# Altium PCB CW308T_EMF32GG11.PcbDoc
Units mil, origin at the board's own origin, x right, y up, seen from the top; angles counter-clockwise.
Board outline 2055 x 2540 mil, 2 copper layers (Top Layer, Bottom Layer); 14 components, 25 nets, 161 pads, 68 vias.
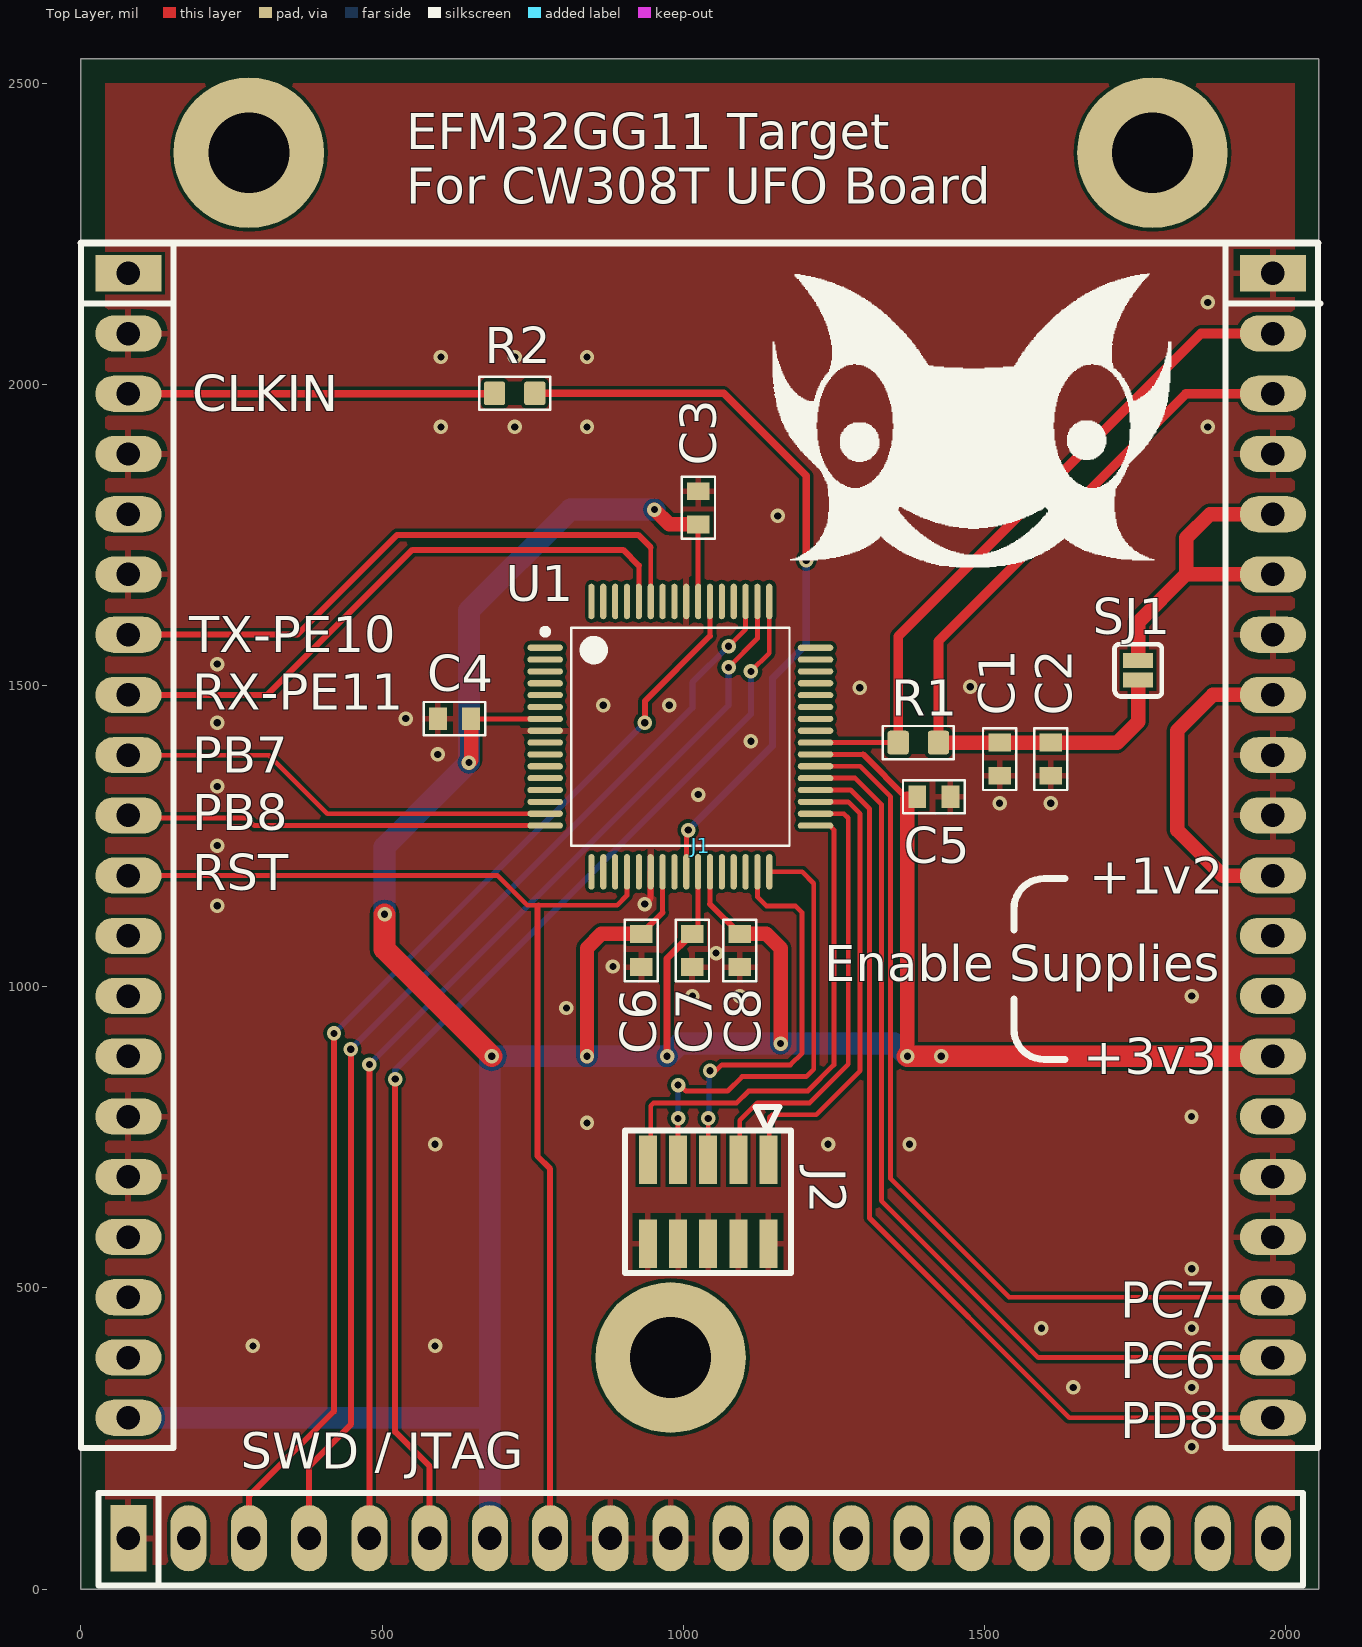
[diagram p0: Top Layer view]
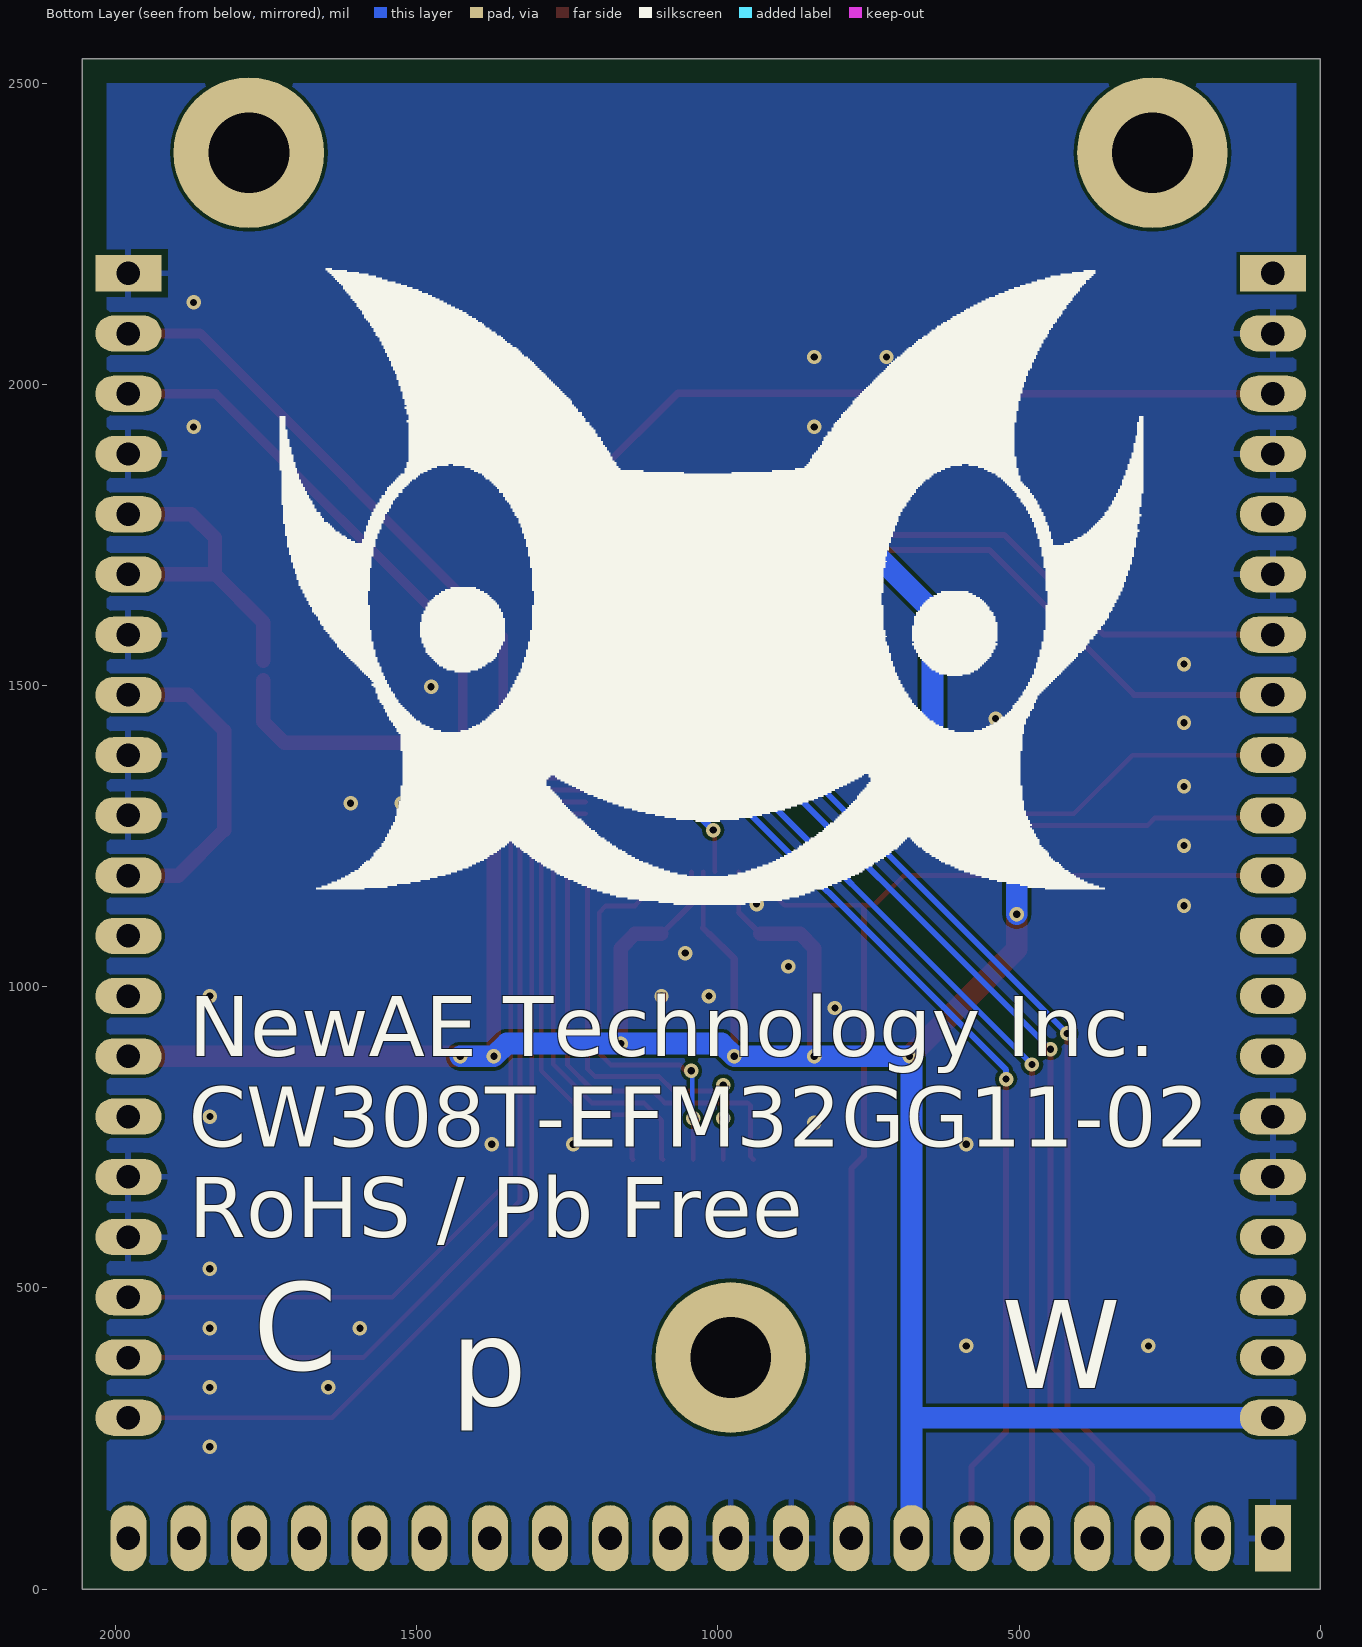
[diagram p1: Bottom Layer view, seen from below]

## Layer stack, top to bottom
Top Solder: solder mask 0.4, Solder Resist, Dk 3.5
Top Layer: signal copper 1.4
Dielectric 1: dielectric 12.6, FR-4, Dk 4.8
Bottom Layer: signal copper 1.4
Bottom Solder: solder mask 0.4, Solder Resist, Dk 3.5

## Board outline
0,0 2055,0 2055,2540 0,2540

## Design rules (kind name [scope] priority, off if disabled: settings)
BoardOutlineClearance Silk_to_Outline [(OnLayer('Top Overlay'))] p1: gap=0 ignorepadtopadclearanceinfootprint=FALSE
BoardOutlineClearance [All] p2: gap=40 ignorepadtopadclearanceinfootprint=FALSE
Clearance [All] p1: gap=6 ignorepadtopadclearanceinfootprint=FALSE except(0: Arc-Hole Track-Hole SMDPad-Hole THPad-Hole Via-Hole Fill-Hole Poly-Hole Region-Hole Text-Hole)
HoleSize [All] p1: absolutevalues=TRUE maxlimit=200 minlimit=1 maxpercent=80.000 minpercent=20.000
MinimumSolderMaskSliver [All] p1: minsoldermaskwidth=5
PlaneConnect PlaneConnect_viaDirect [IsVia] p1: planeconnectstyle=Direct reliefexpansion=20 reliefentries=4 reliefconductorwidth=10 reliefairgap=10
PlaneConnect [All] p2: planeconnectstyle=Relief reliefexpansion=20 reliefentries=4 reliefconductorwidth=10 reliefairgap=10
PolygonConnect PolygonConnect_viaDirect [All vs isVia] p1: connectstyle=Direct reliefconductorwidth=10 reliefentries=4 polygonreliefangle="90 Angle" airgapwidth=10
PolygonConnect [All] p2: connectstyle=Relief reliefconductorwidth=10 reliefentries=4 polygonreliefangle="90 Angle" airgapwidth=10
RoutingVias [All] p1: holewidth=28 width=50 viastyle="Through Hole" minholewidth=28 minwidth=50 maxholewidth=28 maxwidth=50 useviatemplates=TRUE viatemplateguid#1={1A3752DF-5185-4C8F-B12F-78C2E36E3B79} viatemplateguid#2={10C6E2E2-26C8-43AE-A37D-40FB085232FA} viatemplateguid#3={3CB7D92B-ADEE-4C2B-B6B5-F2CE337C13DB} viatemplatename#1=v61h30m0mx0 viatemplatename#2=v86h41m0mx0 viatemplatename#3=v127h71m0mx0
SilkToSilkClearance [All] p1: silktosilkclearance=5
SilkToSolderMaskClearance [IsPad] p1: minsilkscreentomaskgap=5 clearancetoexposedcopper=TRUE
SolderMaskExpansion [All] p1: expansion=4 istentingtop=FALSE
Width [All] p1: maxlimit=100 minlimit=6 preferedwidth=8 minimp=50.000000 maximp=50.000000 favimp=50.000000
25 further rules are at their usual default settings.

## Components (designator, comment, footprint, x,y, rotation, side; value= is the part's Value field where it differs from the comment)
C1 "100n" CAPC0603_M 1525,1377.6 r270 top
C2 "2u2" CAPC0603_M 1610,1377.6 r270 top
C3 "100n" CAPC0603_M 1025,1795 r90 top
C4 "100n" CAPC0603_M 620,1445 r180 top
C5 "100n" CAPC0603_M 1415.83,1315.21 r0 top
C6 "100n" CAPC0603_M 930,1060 r270 top
C7 "100n" CAPC0603_M 1015,1060 r270 top
C8 "100n" CAPC0603_M 1093.74,1060 r270 top
J1 "CW308_TARGETCON" CW308_TBOARD_CONN 78.74,2184.25 r0 top locked
J2 "1296-T10" 1296-T10 1041.19,643.03 r180 top
R1 "22R" RESC1608X55N 1390,1405.16 r0 top
R2 "22R" RESC1608X55N 720,1985 r180 top
SJ1 "NO" SJ_2S_NO 1755,1525 r90 top
U1 "EFM32GG11B1" TQFP50P1200X1200X120-64N 995,1415 r0 top locked

## Footprints (in the part's own frame and the unit in brackets; to place one, negate y for a bottom-side part, rotate by r counter-clockwise, add the part's x,y. Pads: shape width x height; smd on the part's side, far side on the other; paste and mask are expansions set on the pad)
1296-T10 [mm] "1.27mm x 10-pin"
  rect 0.76x2.05 smd: 1(-2.54,-1.775) 2(-2.54,1.775) 3(-1.27,-1.775) 4(-1.27,1.775) 5(0,-1.775) 6(0,1.775) 7(1.27,-1.775) 8(1.27,1.775) 9(2.54,-1.775) 10(2.54,1.775)
  silkscreen extent -3.5,-4 3.5,3
CAPC0603_M [mm]
  rect 0.75x0.95 smd: 1(-0.7,0) 2(0.7,0)
  silkscreen extent -1.3,-0.7 1.3,0.7, body extent -0.85,-0.45 0.85,0.45, height 0.9
CW308_TBOARD_CONN [mil]
  rect 110x60 hole 39: A1(0,0) C1(1900,0)
  oval 110x60 hole 39: A2(0,-100) A3(0,-200) A4(0,-300) A5(0,-400) A6(0,-500) A7(0,-600) A8(0,-700) A9(0,-800) A10(0,-900) A11(0,-1000) A12(0,-1100) A13(0,-1200) A14(0,-1300) A15(0,-1400) A16(0,-1500) A17(0,-1600) A18(0,-1700) A19(0,-1800) A20(0,-1900) C2(1900,-100) C3(1900,-200) C4(1900,-300) C5(1900,-400) C6(1900,-500) C7(1900,-600) C8(1900,-700) C9(1900,-800) C10(1900,-900) C11(1900,-1000) C12(1900,-1100) C13(1900,-1200) C14(1900,-1300) C15(1900,-1400) C16(1900,-1500) C17(1900,-1600) C18(1900,-1700) C19(1900,-1800) C20(1900,-1900)
  rect 60x110 hole 39: B1(0,-2100)
  oval 60x110 hole 39: B2(100,-2100) B3(200,-2100) B4(300,-2100) B5(400,-2100) B6(500,-2100) B7(600,-2100) B8(700,-2100) B9(800,-2100) B10(900,-2100) B11(1000,-2100) B12(1100,-2100) B13(1200,-2100) B14(1300,-2100) B15(1400,-2100) B16(1500,-2100) B17(1600,-2100) B18(1700,-2100) B19(1800,-2100) B20(1900,-2100)
  round 250 hole 134: MH1(200,200) MH2(900,-1800) MH2(1700,200)
  silkscreen extent -79,-2179 1979,50, body extent -50,-2149 1950,50, height 48
RESC1608X55N [mm] "Chip Resistor, Body 1.6x0.8mm, EIA 0603, IPC Medium Density"
  round 0.254 on Mech15: 0(0,0)
  rrect25% 0.9x1 smd: 1(-0.85,0) 2(0.85,0)
  Top Layer pour cut-out: -0.6,0.5 0.6,0.5 0.6,-0.5 -0.6,-0.5
  silkscreen extent -1.5,-0.7 1.5,0.7, body extent -0.87,-0.47 0.88,0.48, height 0.54
SJ_2S_NO [mil] "Solder Jumper, open (no paste)"
  rect 25x50 smd paste-393.7: 1(-16.22,0) 2(16.22,0)
  silkscreen extent -43,-39 43,39
TQFP50P1200X1200X120-64N [mm] "TQFP, 64-Leads, Body 10.00x10.00mm, Pitch 0.50mm, IPC Medium Density"
  oval 1.5x0.26 smd: 1(-5.7,3.75) 2(-5.7,3.25) 3(-5.7,2.75) 4(-5.7,2.25) 5(-5.7,1.75) 6(-5.7,1.25) 7(-5.7,0.75) 8(-5.7,0.25) 9(-5.7,-0.25) 10(-5.7,-0.75) 11(-5.7,-1.25) 12(-5.7,-1.75) 13(-5.7,-2.25) 14(-5.7,-2.75) 15(-5.7,-3.25) 16(-5.7,-3.75) 33(5.7,-3.75) 34(5.7,-3.25) 35(5.7,-2.75) 36(5.7,-2.25) 37(5.7,-1.75) 38(5.7,-1.25) 39(5.7,-0.75) 40(5.7,-0.25) 41(5.7,0.25) 42(5.7,0.75) 43(5.7,1.25) 44(5.7,1.75) 45(5.7,2.25) 46(5.7,2.75) 47(5.7,3.25) 48(5.7,3.75)
  oval 0.26x1.5 smd: 17(-3.75,-5.7) 18(-3.25,-5.7) 19(-2.75,-5.7) 20(-2.25,-5.7) 21(-1.75,-5.7) 22(-1.25,-5.7) 23(-0.75,-5.7) 24(-0.25,-5.7) 25(0.25,-5.7) 26(0.75,-5.7) 27(1.25,-5.7) 28(1.75,-5.7) 29(2.25,-5.7) 30(2.75,-5.7) 31(3.25,-5.7) 32(3.75,-5.7) 49(3.75,5.7) 50(3.25,5.7) 51(2.75,5.7) 52(2.25,5.7) 53(1.75,5.7) 54(1.25,5.7) 55(0.75,5.7) 56(0.25,5.7) 57(-0.25,5.7) 58(-0.75,5.7) 59(-1.25,5.7) 60(-1.75,5.7) 61(-2.25,5.7) 62(-2.75,5.7) 63(-3.25,5.7) 64(-3.75,5.7)
  silkscreen extent -5.82,-4.6 4.6,4.6, body extent -6,-6 6,6, height 1.2

## Part data
C1 C3 C4 C5 C6 C7 C8: library part CCHIP-100n-0603, "100n, 0603", Case-EIA=0603, Case-Metric=1608, Manufacture 1=Kemet, Manufacture Part Number 1=C0603C104K5RACTU, Rated Voltage=50VDC, Supplier Part Number 1=399-5089-2-ND, Component Group=Capacitor, Component Type=Standard, Mounting Technology=SMT, Part Number=CCHIP-100n-0603, Pin Count=2, Supplier 1=Digi-Key
C2: library part CCHIP-2u2-0603, "2u2, 0603", Case-EIA=0603, Case-Metric=1608, Manufacture 1=Samsung, Manufacture Part Number 1=CL10B225KP8NNNC, Rated Voltage=10VDC, Supplier Part Number 1=1276-1134-2-ND, Component Group=Capacitor, Component Type=Standard, Mounting Technology=SMT, Part Number=CCHIP-2u2-0603, Pin Count=2, Supplier 1=Digi-Key
J1: library part CW308_TBOARD, "CW308 \"Standard\" Target Board Connector", Component Group=Mechanical, Component Type=Standard, Mounting Technology=Through-hole, Part Number=CW308_TBOARD, Pin Count=60, Pitch=2.54mm
J2: "Header, 10-pin, SMD, 0.05\"", Manufacture Part Number 1=20021121-00010C4LF, Supplier Part Number 1=609-3695-1-ND, Component Group=Connector, Component Type=Standard, Mounting Technology=SMT, Part Number=1296-T10, Pin Count=10, Supplier 1=Digi-Key
R1 R2: library part RCHIP-22R-0603, "22R res, 0603, 1%, 1/10W", Case-EIA=0603, Case-Metric=1608, Manufacture 1=Yageo, Manufacture Part Number 1=RC0603FR-0722RL, Rated Power=0.1W, Rated Voltage=75VDC, Supplier Part Number 1=311-22.0HRCT-ND, Temperature Range="-55C to 155C", Tolerance=1%, Component Group=Resistor, Component Type=Standard, Mounting Technology=SMT, Part Number=RCHIP-22R-0603, Pin Count=2, Supplier 1=Digi-Key
SJ1: library part SJ_2S_NO, "Solder Jumper, NO", Component Group="PCB Feature", Component Type="Standard (No BOM)", Mounting Technology=COPPER, Part Number=SJ_2S_NO, Pin Count=2
U1: "MCU Giant Gecko 11 Ultra Low Power MCU, Cortex-M4 72MHz QFP64 2048kB(Flash) 512kB(RAM) 53GPIO", Manufacture 1="Silicon Labs", Manufacture Part Number 1=EFM32GG11B120F2048GQ64-A, Supplier Part Number 1=634-11120F2048GQ64, Component Group="Digital IC", Component Type=Standard, Mounting Technology=SMT, Part Number=EFM32GG11B1, Pin Count=64, PP Material Stack=0, PP Rotation=0, RoHS=Yes, Supplier 1=Mouser

## Via types
v1: diameter 24, hole 12, Top Layer to Bottom Layer, tented both sides, 68 vias

## Nets (pads, with @x,y where several pads share a name; then routed paths per layer and width w, separated by ;. In a path a pad name is that pad's centre, name@x,y a point inside that pad or via, vN(x,y) a via of type N, cw(c..) or ccw(c..) an arc to the next point about the centre after c; other vN are vias at no path point)
+3v3: C3.1 C4.1 C5.1 C6.1 C7.1 C8.1 J1.A20 J1.B7 J1.C14 U1.7 U1.23 U1.26 U1.27 U1.39 U1.55 | length 6125.5
  Top Layer w8: C4.1@648.03,1444.53 U1.7 ; 965.47,1123.03 U1.23 ; C7.1@1024.53,1097.09 U1.26 ; U1.55 C3.1@1024.53,1766.97 ; 1044.21,1137.09 U1.27 ; U1.39 1298.4,1385.47
  Top Layer w10: C4.1 C4.1@648.03,1444.53 ; C6.1 965.47,1123.03 ; C7.1 C7.1@1024.53,1097.09 ; C3.1@1024.53,1766.97 C3.1 ; 1044.21,1137.09 C8.1 ; 1298.4,1385.47 1372,1311.88
  Top Layer w12: v1(973,884.25) 973,1046.53 1014.03,1087.56 C7.1
  Top Layer w24: v1(644,1372) 647.56,1375.56 C4.1 ; v1(840,884.25) 840,1064 863.56,1087.56 C6.1 ; v1(952,1792) 976.56,1767.44 C3.1 ; C8.1 1137.86,1087.56 1161.42,1064 v1(1161.42,905.51) ; v1(1372,884.25) 1372,1311.88
  Top Layer w36: v1(504,1120) 504,1062.25 v1(682,884.25) ; v1(1372,884.25) v1(1428,884.25) J1.C14
  Bottom Layer w36: J1.A20 678.74,284.25 ; v1(504,1120) 504,1232 v1(644,1372) 644,1624 812,1792 v1(952,1792) ; J1.B7 678.74,284.25 ; v1(1428,884.25) v1(1372,884.25) 1350.74,905.51 v1(1161.42,905.51) 994.26,905.51 v1(973,884.25) v1(840,884.25) v1(682,884.25) 678.74,880.99 678.74,284.25
CLKIN: R2.1 U1.25 | length 1247.2
  Top Layer w8: U1.25 1005.27,1191.02 1005.27,1257.27 v1(1008,1260)
  Top Layer w12: R2.1 1067,1985 1204,1848 v1(1204,1708)
  Bottom Layer w12: v1(1008,1260) 1148,1400 1148,1512 1204,1568 v1(1204,1708)
ETM_CLK: J2.1 U1.35 | length 762
  Top Layer w8: J2.1 1142.64,714.36 1142.64,782.72 1147.32,787.4 1220.47,787.4 1293.31,860.24 1293.31,1287.05 1273.62,1306.73 U1.35
ETM_D0: J2.3 U1.34 | length 750.5
  Top Layer w8: J2.3 1093.74,715.46 1093.74,777.87 1122.95,807.09 1209.57,807.09 1273.62,871.14 1273.62,1280 1266.57,1287.05 U1.34
ETM_D1: J2.5 U1.31 | length 679.3
  Top Layer w8: J2.5 v1(1041.19,781.23) v1@1044.21,784.25 ; v1(1044.21,860.24) 1045.71,858.74 1052.34,858.74 1063.68,870.08 1177.68,870.08 1197.2,889.61 1197.2,1123.03 1186.12,1134.12 1137.86,1134.12 1122.95,1149.03 U1.31
  Bottom Layer w8: v1(1041.19,781.23) 1042.7,782.74 1042.7,858.72 v1(1044.21,860.24)
ETM_D2: J2.7 U1.32 | length 758.2
  Top Layer w8: J2.7 v1(991.19,781.23) ; v1(991.19,836.61) 994.03,836.61 1003.87,826.77 1073.74,826.77 1097.58,850.61 1204,850.61 1216.54,863.15 1216.54,1171.26 1197.2,1190.59 U1.32
  Bottom Layer w8: v1(991.19,781.23) v1(991.19,836.61)
ETM_D3: J2.9 U1.33 | length 847.5
  Top Layer w8: J2.9 945.79,717.51 945.79,802.4 950.47,807.09 1088.58,807.09 1108.27,826.77 1206.69,826.77 1250,870.08 1250,1260.58 1243.21,1267.36 U1.33
FILT: J1.C5 J1.C6 SJ1.2 | length 541.4
  Top Layer w24: SJ1.2 1755,1605 1834.25,1684.25 ; J1.C6 1834.25,1684.25 ; J1.C5 1874.25,1784.25 1835,1745 1835,1685 1834.25,1684.25
GND: C1.2 C2.2 C3.2 C4.2 C5.2 C6.2 C7.2 C8.2 J1.A2 J1.A4 J1.A6 J1.A15 J1.A16 J1.B1 J1.B9 J1.B10 J1.C1 J1.C4 J1.C7 J1.C9 J1.C10 J1.C16 J1.C17 J2.2 J2.4 J2.6 J2.8 J2.10 U1.8 U1.22 U1.56 | length 57.6
  Top Layer w10: v1(936,1137.09) 945.79,1146.87 U1.22
  other v1: 1843.8,236.22 1647.08,334.65 1843.8,334.65 285.43,403.54 587.78,403.54 1594.49,433.07 1843.8,433.07 1843.8,531.5 587.78,738.19 1240.16,738.19 1375.45,738.19 840,773.81 1843.54,784.25 805.9,964.57 1015,984.25 1093.74,984.25 1843.8,984.25 882.99,1033.46 1054.28,1055.72 226.38,1134.12 226.38,1234.18 1525,1304.42 1610,1304.42 1024.62,1318.9 226.38,1332.32 592.44,1385.47 1112.2,1407.48 226.38,1438.25 539.19,1445 867.05,1467 976.46,1467 1293,1496.06 1476.38,1497.68 226.38,1535.43 1156.77,1781.5 1258.25,1781.5 597.44,1929.13 720.25,1929.13 840,1929.13 1870.51,1929.13 597.44,2045.28 720.25,2045.28 840,2045.28 1870.51,2135.83
GPIO3: J1.A9 U1.15 | length 732.1
  Top Layer w8: J1.A9 311.85,1384.25 409.06,1287.05 U1.15
GPIO4: J1.A10 U1.16 | length 698.8
  Top Layer w8: J1.A10 82.99,1280 275,1280 287.64,1267.36 U1.16
NetJ1_A3: J1.A3 R2.2 | length 608.1
  Top Layer w12: J1.A3 685.79,1984.25 R2.2
NetJ1_C8: J1.C8 J1.C11 | length 538.5
  Top Layer w24: J1.C11 1895.75,1184.25 1820,1260 1820,1425.16 1879.09,1484.25 J1.C8
PC6: J1.C19 U1.37 | length 1543.3
  Top Layer w8: U1.37 1285.48,1346.1 1328.74,1302.84 1328.74,644.72 1589.21,384.25 J1.C19
PC7: J1.C18 U1.38 | length 1495.9
  Top Layer w8: U1.38 1293.31,1365.79 1344,1315.09 1344,681 1540.75,484.25 J1.C18
PD8: J1.C20 U1.36 | length 1589
  Top Layer w8: U1.36 1277.96,1326.42 1309.06,1295.32 1309.06,615.94 1640.75,284.25 J1.C20
RST: J1.A11 J1.B8 U1.20 | length 1954.3
  Top Layer w8: J1.A11 691.75,1184.25 741,1135 759.87,1135 890,1135 906.42,1151.42 U1.20
  Top Layer w10: 759.87,1135 757.87,1133 757.87,718.5 778.74,697.64 J1.B8
SHUNTH: C1.1 C2.1 J1.C3 R1.2 SJ1.1 | length 1308.5
  Top Layer w16: R1.2 1423.46,1573.46 1834.25,1984.25 J1.C3
  Top Layer w24: R1.2 C1.1 C2.1 1720.16,1405.16 1755,1440 SJ1.1
SHUNTL: J1.C2 R1.1 U1.40 | length 1143.9
  Top Layer w8: U1.40 R1.1
  Top Layer w16: R1.1 1356.54,1581.54 1859.25,2084.25 J1.C2
SWCLK: J1.B6 U1.49 | length 1836
  Top Layer w8: v1(1112.2,1523.27) 1142.64,1553.7 U1.49
  Top Layer w10: v1(521.65,846.46) 521.65,260.83 578.74,203.74 J1.B6
  Bottom Layer w10: v1(521.65,846.46) 521.65,861.91 1112.2,1452.46 v1(1112.2,1523.27)
SWDIO/TMS: J1.B5 U1.50 | length 1822
  Top Layer w8: v1(1075,1530) 1122.95,1577.95 U1.50
  Top Layer w10: J1.B5 v1(478.74,870.74)
  Bottom Layer w10: v1(478.74,870.74) 1075,1467 v1(1075,1530)
TDI: J1.B3 U1.54 | length 1872.2
  Top Layer w8: 1044.21,1582.32 U1.54
  Top Layer w10: J1.B3 278.74,153.74 420,295 v1(420,922.25) ; v1(936,1438.25) 936,1474.11 1044.21,1582.32
  Bottom Layer w10: v1(420,922.25) v1(936,1438.25)
TDO: J1.B4 U1.51 | length 1855.3
  Top Layer w8: v1(1075,1565) 1103.27,1593.27 U1.51
  Top Layer w10: J1.B4 378.74,203.74 448,273 v1(448,896)
  Bottom Layer w10: v1(448,896) 1015,1463 1015,1505 v1(1075,1565)
US0_RX: J1.A8 U1.60 | length 1017.4
  Top Layer w8: U1.60 926.1,1698.9
  Top Layer w10: J1.A8 309.25,1484.25 550,1725 900,1725 926.1,1698.9
US0_TX: J1.A7 U1.59 | length 1034.1
  Top Layer w8: U1.59 945.79,1729.21
  Top Layer w10: J1.A7 359.25,1584.25 525,1750 925,1750 945.79,1729.21
pads on no net: J1.A1 J1.A5 J1.A12 J1.A13 J1.A14 J1.A17 J1.A18 J1.A19 J1.B2 J1.B11 J1.B12 J1.B13 J1.B14 J1.B15 J1.B16 J1.B17 J1.B18 J1.B19 J1.B20 J1.C12 J1.C13 J1.C15 J1.MH1 J1.MH2 R1.0 R2.0 U1.1 U1.2 U1.3 U1.4 U1.5 U1.6 U1.9 U1.10 U1.11 U1.12 U1.13 U1.14 U1.17 U1.18 U1.19 U1.21 U1.24 U1.28 U1.29 U1.30 U1.41 U1.42 U1.43 U1.44 U1.45 U1.46 U1.47 U1.48 U1.52 U1.53 U1.57 U1.58 U1.61 U1.62 U1.63 U1.64

## Polygon pours and split planes (outlines as drawn)
GND on Bottom Layer "GND_L02_P002" (solid, remove dead copper, pour order 2): 0,2539.37 2047.24,2539.37 2047.24,0 0,0
GND on Top Layer "GND_L01_P000" (solid, remove dead copper, pour order 0): 0,2539.37 2047.24,2539.37 2047.24,0 0,0

## Silkscreen, mask and mechanical layers (free items; w line width, h text height)
Top Overlay:
  drawing of 10 lines, arcs and shapes, not listed
  text "EFM32GG11 Target / For CW308T UFO Board" at 540,2300 h60
  text "CLKIN" at 185,1955 h60
  text "TX-PE10" at 180,1555 h60
  text "RX-PE11" at 185,1460 h60
  text "PB7" at 185,1355 h60
  text "PB8" at 185,1260 h60
  text "RST" at 185,1160 h60
  text "+1v2" at 1673.74,1154.25 h60
  text "Enable Supplies" at 1233.74,1009.25 h60
  text "+3v3" at 1663.74,854.25 h60
  text "PC7" at 1725,450 h60
  text "PC6" at 1725,350 h60
  text "PD8" at 1725,250 h60
  text "SWD / JTAG" at 265,200 h60
Bottom Overlay:
  drawing of 3 lines, arcs and shapes, not listed
  text "NewAE Technology Inc. / CW308T-EFM32GG11-02 / RoHS / Pb Free" at 1878.74,584.25 h100
  text "C" at 1771.65,314.96 h250
  text "W" at 528.72,285.43 h250
  text "p" at 1443.51,255.91 h250
Mechanical 1:
  the board outline again, w10